# Altium PCB featherFet2.PcbDoc
Units mm, origin at the board's own origin, x right, y up, seen from the top; angles counter-clockwise.
Board outline 50.04 x 22.86 mm, 2 copper layers (Top Layer, Bottom Layer); 21 components, 23 nets, 85 pads, 16 vias.
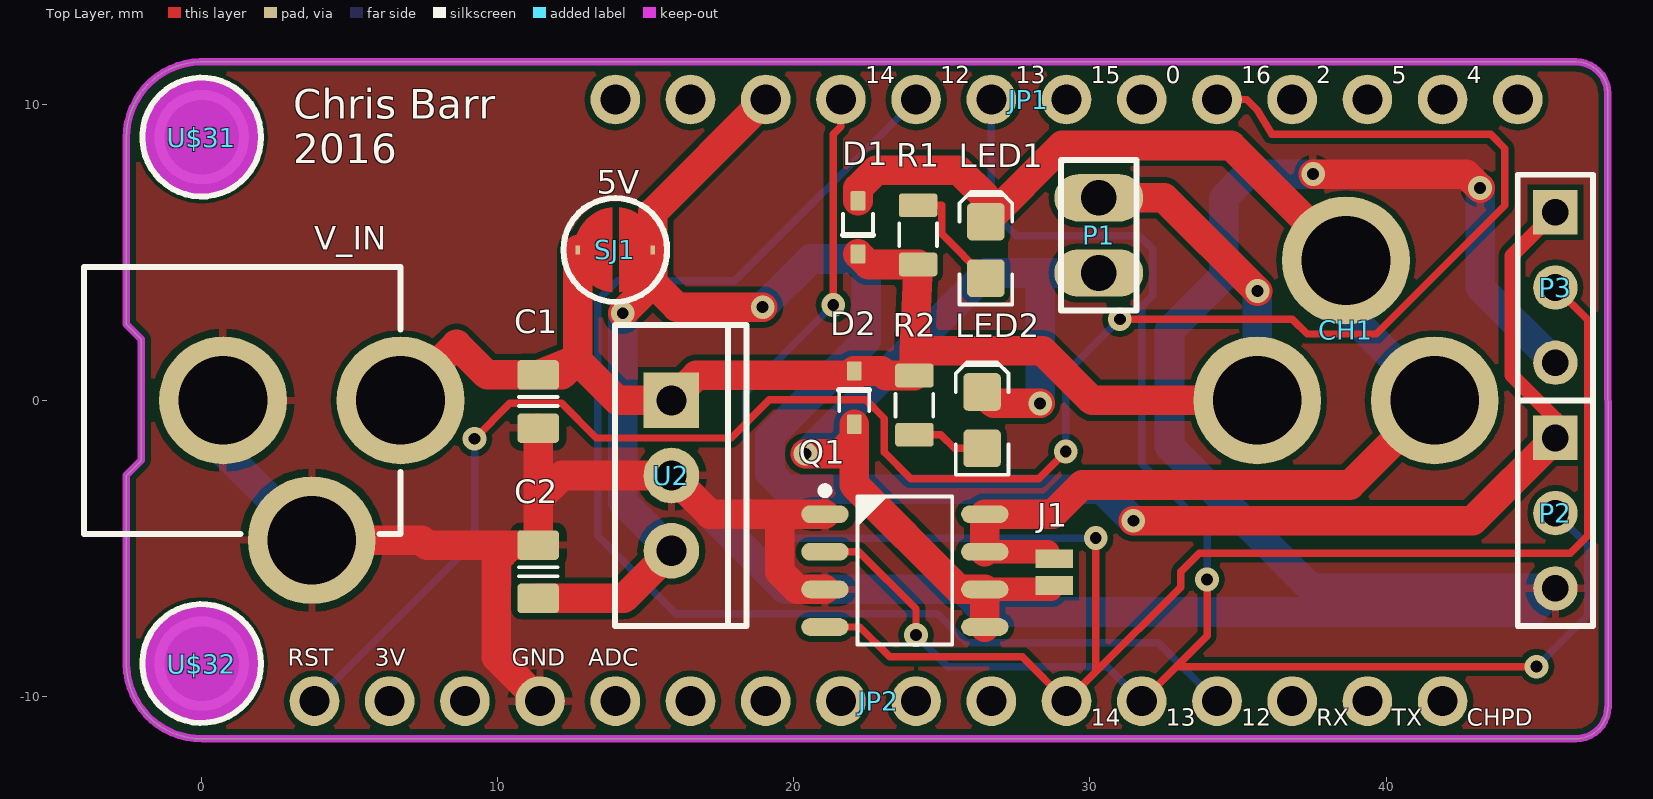
[diagram p0: Top Layer view]
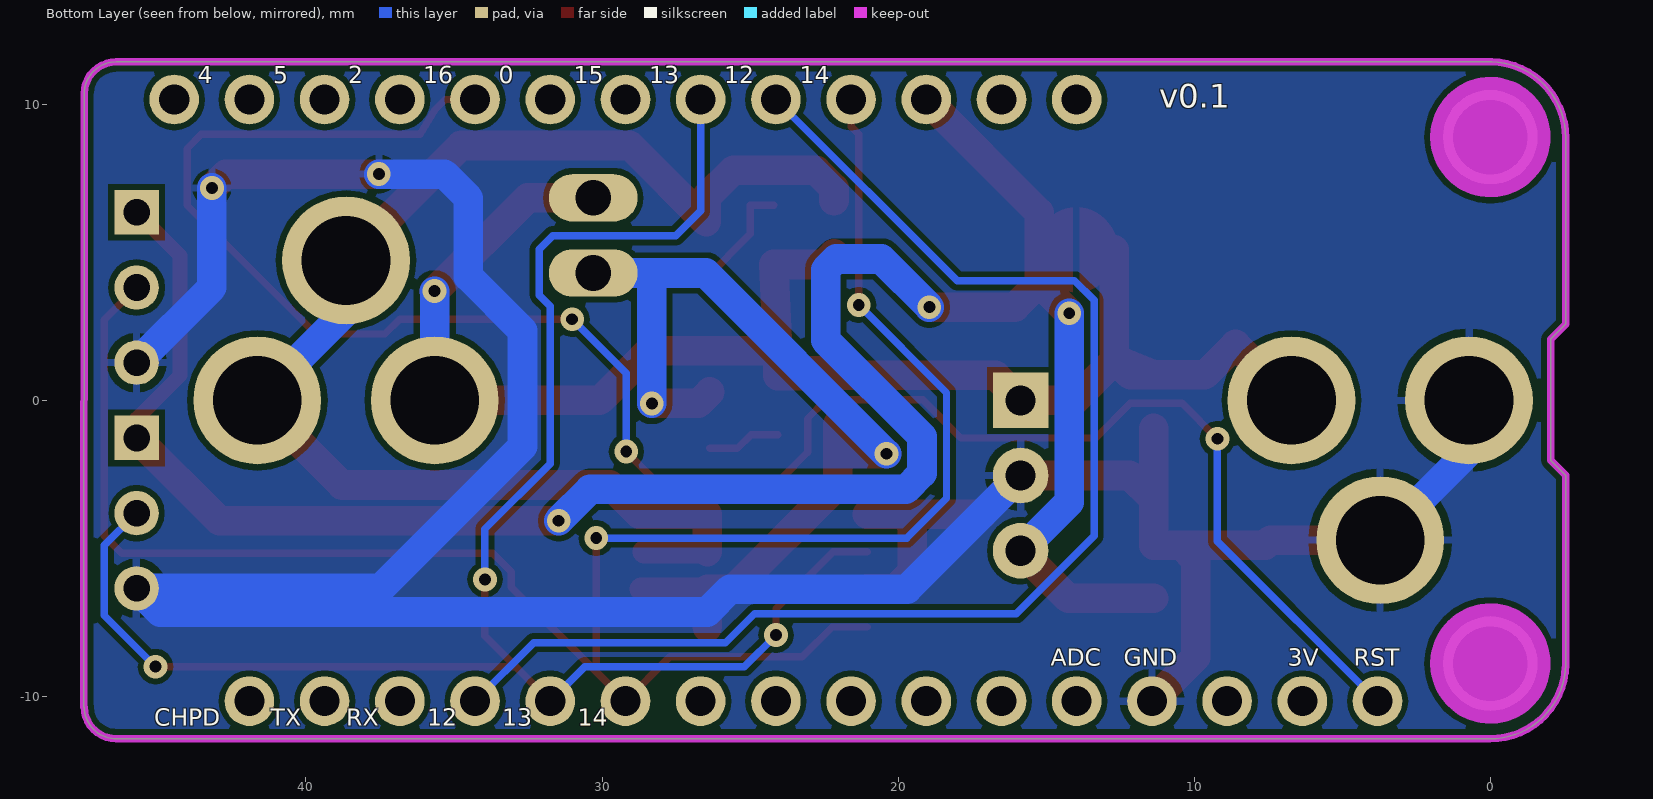
[diagram p1: Bottom Layer view, seen from below]

## Layer stack, top to bottom
Top Solder: solder mask 0.0102, Solder Resist, Dk 3.5
Top Layer: signal copper 0.0356
Dielectric1: dielectric 0.32, FR-4, Dk 4.8
Bottom Layer: signal copper 0.0356
Bottom Solder: solder mask 0.0102, Solder Resist, Dk 3.5

## Board outline
-2.54,-8.929 -2.54,-2.53 -2.04,-2.03 -2.04,2.07 -2.54,2.57 -2.54,8.87 cw(c0,8.89) -0.039,11.43 46.4,11.43 cw(c46.409,10.344) 47.494,10.361 47.5,-10.361 47.494,-10.361 cw(c46.409,-10.344) 46.4,-11.43 0.02,-11.43 cw(c0,-8.89)

## Design rules (kind name [scope] priority, off if disabled: settings)
Clearance [All] p1: gap=0.2
FabricationTestPointUsage TestPointUsage [All] p1: valid=0 allowmultiple=FALSE
FabricationTestpoint Testpoint [All] p1: side=3 testpointundercomponent=TRUE minsize=1.016 maxsize=2.54 preferedsize=1.524 minholesize=0 maxholesize=1.016 preferedholesize=0.813 testpointgrid=0.025 allowsidetop=TRUE allowsidebottom=TRUE usegrid=TRUE gridtolerance=0
HoleSize [All] p1: absolutevalues=TRUE maxlimit=3.5 minlimit=0.025 maxpercent=80.000 minpercent=20.000
PolygonConnect [All] p1: connectstyle=Relief reliefconductorwidth=0.254 reliefentries=4 polygonreliefangle="90 Angle" airgapwidth=0.254
RoutingVias [All] p1: holewidth=0.4 width=0.8 viastyle="Through Hole" minholewidth=0.25 minwidth=0.5 maxholewidth=1 maxwidth=1.4
SilkToSolderMaskClearance SilkscreenOverComponentPads [IsPad] p1: minsilkscreentomaskgap=0.254 clearancetoexposedcopper=TRUE
SolderMaskExpansion [All] p1: expansion=0.102
Width Width_Power [(InNet('+3V3') OR InNet('C1_NEG') OR InNet('C2_NEG') OR InNet('GND') OR InNet('VBUS') OR InNet('V_PWR'))] p1: maxlimit=1 minlimit=0.2 preferedwidth=1 minimp=50.000000 maximp=50.000000 favimp=50.000000
Width [All] p2: maxlimit=1 minlimit=0.2 preferedwidth=0.25
26 further rules are at their usual default settings.

## Components (designator, comment, footprint, x,y, rotation, side; value= is the part's Value field where it differs from the comment)
C1 "approved sub OK" CAPC2012X135N 11.365,-0.04 r270 top
C2 "approved sub OK" CAPC2012X135N 11.365,-5.79 r90 top
CH1 "Power JackThis is the standard 5.5mm barrel jack for power. The PTH is the most common, proven, reliable, footprint. The Slot footprint only works if the mill layer is transmitted to the PCB fab house so be warned. Mating wall wart : TOL-00298 (and others)" POWER_JACK_PTH 49.365,0 r90 top
D1 "1N4148" SOD523F 22.166,5.842 r90 top
D2 "1N4148" SOD523F 22.04,0.092 r270 top
J1 "JUMPER-PAD-2-NO" PAD-JUMPER-2-NO_NO_SILK 28.8,-5.8 r270 top
JP1 "HEADER-1X12" 1X12_ROUND 27.94,10.16 r0 top locked
JP2 "HEADER-1X16ROUND" 1X16_ROUND 22.86,-10.16 r180 top locked
LED1 "Red" LED-0805-K 26.484,5.08 r90 top
LED2 "Red" LED-0805-K 26.358,-0.67 r90 top
P1 "Header 2" HDR1X2 30.3,4.3 r90 top
P2 "Header 3" HDR1X3 45.72,-1.27 r270 top
P3 "Header 3" HDR1X3 45.72,6.35 r270 top
Q1 "MOSFET_AO4818B" SOIC127P600X175-8AN 23.75,-5.75 r0 top
R1 "Thick Film" RESC2012X70N 24.198,5.588 r90 top
R2 "Thick Film" RESC2012X70N 24.072,-0.162 r270 top
SJ1 "JUMPER-PAD-2-NOROUND" PAD-JUMPER-2-NO_YES_SILK_ROUND 13.97,5.08 r0 top
U2 "LM7805" TO220-IGO 15.865,-2.54 r270 top
U$31 "MOUNTINGHOLE2.5" MOUNTINGHOLE_2.5_PLATED 0,8.89 r270 top locked
U$32 "MOUNTINGHOLE2.5" MOUNTINGHOLE_2.5_PLATED 0,-8.89 r270 top locked
V_IN "Power JackThis is the standard 5.5mm barrel jack for power. The PTH is the most common, proven, reliable, footprint. The Slot footprint only works if the mill layer is transmitted to the PCB fab house so be warned. Mating wall wart : TOL-00298 (and others)" POWER_JACK_PTH -7,0 r270 top

## Footprints (in the part's own frame and the unit in brackets; to place one, negate y for a bottom-side part, rotate by r counter-clockwise, add the part's x,y. Pads: shape width x height; smd on the part's side, far side on the other; paste and mask are expansions set on the pad)
1X12_ROUND [mil] "1X12_ROUND"
  round 66 hole 40: 1(-550,0) 2(-450,0) 3(-350,0) 4(-250,0) 5(-150,0) 6(-50,0) 7(50,0) 8(150,0) 9(250,0) 10(350,0) 11(450,0) 12(550,0)
1X16_ROUND [mil] "1X16_ROUND"
  round 66 hole 40: 1(-750,0) 2(-650,0) 3(-550,0) 4(-450,0) 5(-350,0) 6(-250,0) 7(-150,0) 8(-50,0) 9(50,0) 10(150,0) 11(250,0) 12(350,0) 13(450,0) 14(550,0) 15(650,0) 16(750,0)
CAPC2012X135N [mm] "Chip Capacitor, Body 2.0x1.2mm, EIA 0805, IPC Medium Density"
  round 0.254 on Mech15: 0(0,0)
  rrect25% 1x1.4 smd: 1(-0.9,0) 2(0.9,0)
  Top Layer pour cut-out: -0.675,0.7 -0.475,0.9 0.475,0.9 0.675,0.7 0.675,-0.7 0.475,-0.9 -0.475,-0.9 -0.675,-0.7
  silkscreen extent -0.15,-0.65 0.15,0.65, body extent -1.1,-0.72 1.1,0.73, height 1.34
HDR1X2 [mm] "Connector; Header; 2 Position"
  oval 1.6x3 hole 1.2: 1(0,0) 2(2.54,0)
  silkscreen extent -1.27,-1.27 3.81,1.27
HDR1X3 [mm] "Connector; Header; 3 Position"
  rect 1.5x1.5 hole 0.9: 1(0,0)
  round 1.5 hole 0.9: 2(2.54,0) 3(5.08,0)
  silkscreen extent -1.27,-1.27 6.35,1.27
LED-0805-K [mil]
  round 20 on Mech15: 0(0,0)
  rrect25% 50x50 smd: A(-37.5,0) K(37.5,0)
  Top Layer pour cut-out: -15,30 15,30 15,-30 -15,-30
  silkscreen extent -72,-35 77,35, body extent -39,-25 39,25, height 31
MOUNTINGHOLE_2.5_PLATED [mil] "MOUNTINGHOLE_2.5_PLATED"
  round 126 hole 99: P$1(0,0)
  Top Layer keep-out circle w80: c0,0 r40
  Bottom Layer keep-out circle w80: c0,0 r40
  silkscreen extent -79,-79 79,79
PAD-JUMPER-2-NO_NO_SILK [mm]
  rect 0.635x1.27 smd: 1(-0.45,0) 2(0.457,0)
PAD-JUMPER-2-NO_YES_SILK_ROUND [mil]
  rrect20% 6x12 smd: 1(-50,0) 2(50,0)
  Top Layer region: -4.38,57 -4.38,-56.25 -29.99,-46.91 -48.1,-26.53 -54.37,0 -54.38,0 -48.23,26.77 -30.12,47.42 -4.37,57
  Top Layer region: 5,-56.25 30.62,-46.91 48.73,-26.53 55,0 55,0 48.86,26.77 30.74,47.42 5,57 5,57
  silkscreen extent -69,-69 69,69
POWER_JACK_PTH [mil]
  round 170 hole 118: GND(0,304) GNDBREAK(186,422) PWR(0,540)
RESC2012X70N [mm] "Chip Resistor, Body 2.0x1.2mm, EIA 0805, IPC Medium Density"
  round 0.254 on Mech15: 0(0,0)
  rrect25% 0.8x1.3 smd: 1(-1,0) 2(1,0)
  Top Layer pour cut-out: -0.725,0.65 -0.525,0.85 0.525,0.85 0.725,0.65 0.725,-0.65 0.525,-0.85 -0.525,-0.85 -0.725,-0.65
  silkscreen extent -0.38,-0.64 0.38,0.63, body extent -1.1,-0.67 1.1,0.68, height 0.69
SOD523F [mm] "SOD-523F; 2 Leads; Body 1.3 x 0.9 mm, (LxW)"
  round 0.508 on Mech15: 0(0,0)
  rrect20% 0.65x0.5 smd: A(0.9,0) K(-0.9,0)
  Top Layer pour cut-out: -0.725,-0.25 -0.725,0.25 -0.525,0.45 0.525,0.45 0.725,0.25 0.725,-0.25 0.525,-0.45 -0.525,-0.45
  silkscreen extent -0.25,-0.51 0.45,0.51, body extent -0.85,-0.45 0.85,0.45, height 0.7
SOIC127P600X175-8AN [mm] "SOIC, 8-Leads, Body 4.9x3.9mm, Pitch 1.27mm, IPC Medium Density"
  round 1 on Mech15: 0(0,0)
  oval 1.6x0.6 smd: 1(-2.7,1.905) 2(-2.7,0.635) 3(-2.7,-0.635) 4(-2.7,-1.905) 5(2.7,-1.905) 6(2.7,-0.635) 7(2.7,0.635) 8(2.7,1.905)
  silkscreen extent -2.82,-2.5 1.6,2.82, body extent -3,-2.45 3,2.45, height 1.75
TO220-IGO [mil]
  round 74 hole 40: GND(0,0) OUT(100,0)
  rect 74x74 hole 40: IN(-100,0)
  silkscreen extent -200,-75 200,100

## Part data
C1: library part CAPC_330n_0805_X7R_25V_10%, "Capacitor SMD Cer 330nF 10% 25V X7R 0805"
C2: library part CAPC_100n_0805_X7R_50V_10%, "Capacitor SMD Cer 100nF 10% 50V X7R 0805"
CH1 V_IN: library part POWER_JACKPTH
D1 D2: library part DIODE_1N4148_200mA_SOD523F, "Diode SMD small signal 0.2A SOD-523F"
JP2: "PIN HEADER"
LED1 LED2: library part LED_SMD_Red_0805_6mcd, "LED 0805 SMD Red 6mcd 621nm"
P1: "Header, 2-Pin"
P2 P3: "Header, 3-Pin"
Q1: "MOSFET Dual-Channel 30V 8.5A SOIC-8 SMD"
R1 R2: library part RES_2K2_0805_1%, "Resistor SMD chip 2.2k Ohm 0.125W 1% 0805"
U2: library part V_REG_78XXSINK
U$31 U$32: "Mounting Hole   For #2 screws (0.086\"/2.18mm width, 0.094\"/2.4mm hole) use 2.5mm"

## Free pads (board coordinates)
  round 1.676 hole 1.016: 0(44.45,10.16)

## Via types
v1: diameter 0.8, hole 0.4, Top Layer to Bottom Layer, 16 vias

## Nets (pads, with @x,y where several pads share a name; then routed paths per layer and width w, separated by ;. In a path a pad name is that pad's centre, name@x,y a point inside that pad or via, vN(x,y) a via of type N, cw(c..) or ccw(c..) an arc to the next point about the centre after c; other vN are vias at no path point)
+3V3: JP2.15
ADC: JP2.12
C1_NEG: CH1.GND CH1.GNDBREAK D1.A J1.1 LED1.K Q1.7 Q1.8 | length 47.2
  Top Layer w0.8: Q1.7 J1.1@28.575,-5.115
  Top Layer w1: D1.A 22.166,7.16 22.776,7.769 25.575,7.769 26.484,6.86 LED1.K 29.059,8.607 34.763,8.607 CH1.GNDBREAK ; Q1.7 Q1.8 28.75,-3.845 29.736,-2.859 38.784,-2.859 CH1.GND
  Bottom Layer w1: CH1.GNDBREAK 38.646,2.997 CH1.GND
C1_PWM: JP1.6 JP2.5 P2.2 Q1.2 | length 58.8
  Top Layer w0.25: Q1.2 22.196,-5.115 24.127,-7.045 v1(24.127,-7.928) ; JP2.5 32.915,-8.995 ; v1(33.957,-6.048) 33.957,-7.953 32.915,-8.995 ; v1(45.082,-8.995) 32.915,-8.995
  Bottom Layer w0.25: v1(24.127,-7.928) 25.194,-8.995 30.585,-8.995 JP2.5 ; JP1.6 26.67,6.398 27.508,5.559 31.671,5.559 32.125,5.105 32.125,3.55 31.747,3.172 31.747,-2.137 33.957,-4.347 v1(33.957,-6.048) ; v1(45.082,-8.995) 46.809,-7.268 46.809,-4.899 P2.2
C2_NEG: D2.A J1.2 LED2.K P1.1 Q1.5 Q1.6 | length 32.3
  Top Layer w0.8: Q1.6 J1.2@28.672,-6.385
  Top Layer w1: v1(20.393,-1.807) 21.557,-1.807 22.04,-1.324 ; D2.A 22.04,-1.324 ; LED2.K 26.745,-0.105 v1(28.318,-0.105) ; Q1.5 Q1.6 25.575,-6.385 22.04,-2.85 22.04,-1.324
  Bottom Layer w1: v1(20.393,-1.807) 26.5,4.3 28.623,4.3 ; v1(28.318,-0.105) 28.318,3.995 28.623,4.3 ; P1.1 28.623,4.3
C2_PWM: JP1.4 JP2.6 P3.2 Q1.4 | length 70
  Top Layer w0.25: Q1.4 22.225,-7.655 23.234,-8.665 27.715,-8.665 JP2.6 30.197,-9.173 ; v1(21.333,3.223) 21.333,8.985 21.59,9.242 JP1.4 ; v1(30.197,-4.651) 30.197,-9.173 ; P3.2 46.809,2.721 46.809,-4.575 46.223,-5.161 33.694,-5.161 33.061,-5.794 33.061,-6.309 30.197,-9.173
  Bottom Layer w0.25: v1(21.333,3.223) 18.368,0.258 18.368,-3.312 19.707,-4.651 v1(30.197,-4.651)
CH_PD: JP2.1
EN: JP1.2
GND: C1.2 C2.2 JP2.13 P2.3 P3.3 Q1.1 Q1.3 U2.GND V_IN.GND V_IN.GNDBREAK | length 110.5
  Top Layer w1: V_IN.GNDBREAK 7.439,-4.724 7.605,-4.89 10.452,-4.89 ; C1.2 11.365,-3.356 ; JP2.13 9.954,-8.684 9.954,-5.388 10.452,-4.89 ; Q1.3 20.12,-6.385 19.529,-5.794 19.529,-4.169 19.853,-3.845 ; Q1.1 19.853,-3.845 ; v1(37.538,7.642) 42.707,7.642 v1(43.177,7.173) ; 10.452,-4.89 C2.2 11.365,-3.356 ; 11.365,-3.356 12.181,-2.54 U2.GND 17.17,-3.845 19.853,-3.845
  Bottom Layer w1: V_IN.GND 0.722,-1.727 V_IN.GNDBREAK ; U2.GND 19.703,-6.378 25.677,-6.378 26.447,-7.149 44.921,-7.149 P2.3 37.484,-6.35 32.688,-1.554 32.688,2.35 34.515,4.177 34.515,6.829 35.328,7.642 v1(37.538,7.642) ; v1(43.177,7.173) 43.177,3.813 P3.3
GPIO0: JP1.8
GPIO2: JP1.10
GPIO4/SDA: JP1.12
GPIO5/SCL: JP1.11
GPIO12/MISO: JP1.5 JP2.4 | length 44.7
  Bottom Layer w0.25: JP1.5 18.005,4.035 14.043,4.035 13.383,3.375 13.383,-4.575 16.01,-7.203 24.852,-7.203 25.831,-8.182 32.312,-8.182 JP2.4
GPIO15: JP1.7
GPIO16: JP1.9 JP2.16 | length 67.4
  Top Layer w0.25: v1(9.217,-1.299) 10.411,-0.105 12.163,-0.105 13.332,-1.273 17.884,-1.273 19.174,0.017 22.43,0.017 23.06,-0.613 23.06,-1.756 23.949,-2.645 28.267,-2.645 v1(29.181,-1.73) ; v1(31.01,2.74) 36.835,2.74 37.335,2.24 39.675,2.24 44.015,6.58 44.015,8.506 43.532,8.988 36.141,8.988 35.658,9.801 35.3,10.16 JP1.9
  Bottom Layer w0.25: JP2.16 9.217,-4.753 v1(9.217,-1.299) ; v1(29.181,-1.73) 29.181,0.911 v1(31.01,2.74)
NetLED1_A: LED1.A R1.2 | length 3.9
  Top Layer w0.25: R1.2 24.99,6.588 24.99,5.621 LED1.A
NetLED2_A: LED2.A R2.2 | length 2.5
  Top Layer w0.25: R2.2 24.965,-1.162 25.426,-1.623 LED2.A
RXD: JP2.3
TXD: JP2.2
V_PWR: C1.1 CH1.PWR D1.K D2.K P1.2 R1.1 R2.1 SJ1.1 U2.IN V_IN.PWR | length 53.6
  Top Layer w1: V_IN.PWR 8.607,1.891 9.639,0.86 C1.1 ; SJ1.1 12.7,1.397 ; D1.K 22.52,4.588 R1.1 24.072,1.673 ; P1.2 32.509,6.84 v1(35.658,3.69) ; CH1.PWR 30.074,0 28.4,1.673 24.072,1.673 ; C1.1 12.7,1.397 ; C1.1 12.163,0.86 12.671,1.368 ; 12.671,1.368 12.7,1.397 ; 12.671,1.368 14.039,0 U2.IN 16.707,0.842 22.04,0.842 D2.K 22.958,0.992 23.112,0.838 R2.1 24.072,1.673
  Bottom Layer w1: CH1.PWR 35.649,3.681 v1(35.658,3.69)
VBAT: JP1.1
VBUS: C2.1 JP1.3 P2.1 P3.1 SJ1.2 U2.OUT | length 76.9
  Top Layer w0.5: P2.1 45.72,-0.62 44.252,0.848 44.252,4.882 P3.1
  Top Layer w1: C2.1 14.255,-6.69 U2.OUT ; v1(14.221,2.943) 15.24,3.959 ; v1(18.945,3.146) 16.053,3.146 15.24,3.959 ; JP1.3 15.24,6.35 SJ1.2 15.24,3.959 ; v1(31.467,-4.067) 42.923,-4.067 P2.1
  Bottom Layer w1: v1(14.221,2.943) 14.221,-3.436 U2.OUT ; v1(18.945,3.146) 20.571,4.772 22.095,4.772 22.45,4.416 22.45,2.029 19.193,-1.229 19.193,-2.461 19.739,-3.007 30.407,-3.007 v1(31.467,-4.067)
pads on no net: C1.0 C2.0 D1.0 D2.0 JP2.7 JP2.8 JP2.9 JP2.10 JP2.11 JP2.14 LED1.0 LED2.0 Q1.0 R1.0 R2.0 U$31.P$1 U$32.P$1

## Polygon pours and split planes (outlines as drawn)
GND on Bottom Layer "Bottom Layer-GND" (solid, pour order 8): -2.54,8.87 -0.039,11.371 -0.039,11.43 46.4,11.43 47.469,10.361 47.494,10.361 47.494,-10.355 47.5,-10.361 46.432,-11.43 46.4,-11.43 0.02,-11.43 -2.481,-8.929 -2.54,-8.929
GND on Top Layer "V_PWR_L02_P010" (solid, pour order 10): -2.54,8.87 -0.039,11.371 -0.039,11.43 46.4,11.43 47.469,10.361 47.494,10.361 47.494,-10.355 47.5,-10.361 46.432,-11.43 46.4,-11.43 0.02,-11.43 -2.481,-8.929 -2.54,-8.929

## Keep-outs
Keep-Out Layer:
  lines w0.254: -0.039,11.43 ccw(c0,8.89) -2.54,8.87 -2.54,2.57 -2.04,2.07 -2.04,-2.03 -2.54,-2.53 -2.54,-8.929 ccw(c0,-8.89) 0.02,-11.43 46.4,-11.43 ccw(c46.409,-10.344) 47.494,-10.361 ; -0.039,11.43 46.4,11.43 cw(c46.409,10.344) 47.494,10.361 47.5,-10.361

## Silkscreen, mask and mechanical layers (free items; w line width, h text height)
Top Overlay:
  text "14" at 22.407,10.515 h1
  text "12" at 24.947,10.515 h1
  text "13" at 27.487,10.515 h1
  text "15" at 30.027,10.515 h1
  text "0" at 32.567,10.515 h1
  text "16" at 35.107,10.515 h1
  text "2" at 37.647,10.515 h1
  text "5" at 40.187,10.515 h1
  text "4" at 42.727,10.515 h1
  text "Chris Barr / 2016" at 3.1,8.01 h1
  text "5V" at 13.335,6.985 h0.8
  text "RST" at 2.91,-9.16 h1
  text "3V" at 5.84,-9.16 h1
  text "GND" at 10.48,-9.16 h1
  text "ADC" at 13.05,-9.16 h1
  text "14" at 30.027,-11.195 h1
  text "13" at 32.567,-11.195 h1
  text "12" at 35.107,-11.195 h1
  text "RX" at 37.647,-11.195 h1
  text "TX" at 40.187,-11.195 h1
  text "CHPD" at 42.727,-11.195 h1
Bottom Overlay:
  text "14" at 23.331,10.515 h1
  text "12" at 25.871,10.515 h1
  text "13" at 28.411,10.515 h1
  text "15" at 30.951,10.515 h1
  text "0" at 33.491,10.515 h1
  text "16" at 36.031,10.515 h1
  text "2" at 38.571,10.515 h1
  text "5" at 41.111,10.515 h1
  text "4" at 43.651,10.515 h1
  text "v0.1" at 11.175,9.875 h0.8
  text "RST" at 4.61,-9.16 h1
  text "3V" at 6.84,-9.16 h1
  text "GND" at 12.38,-9.16 h1
  text "ADC" at 14.85,-9.16 h1
  text "14" at 30.827,-11.195 h1
  text "13" at 33.367,-11.195 h1
  text "12" at 35.907,-11.195 h1
  text "RX" at 38.647,-11.195 h1
  text "TX" at 41.187,-11.195 h1
  text "CHPD" at 45.127,-11.195 h1
Mechanical 4:
  lines w0.254: 7.25,-8.93 43.5,-8.93 43.5,9.07 7.25,9.07 7.25,-8.93
Mechanical 14:
  lines w0.254: -2.032,0 46.95,0
Mechanical 16:
  drawing of 1878 lines, arcs and shapes, not listed
  text "1" at -97.285,73.479 h1.78
  text "2" at -24.641,73.479 h1.78
  text "3" at 48.511,73.479 h1.78
  text "4" at 121.409,73.479 h1.78
  text "A" at -131.626,50.467 h1.78
  text "A" at 155.394,50.467 h1.78
  text "B" at -131.626,2.41 h1.78
  text "B" at 155.394,2.41 h1.78
  text "C" at -131.626,-46.104 h1.78
  text "C" at 155.394,-46.104 h1.78
  text "ENGINEER:" at 40.459,-83.112 h1.14
  text "TITLE:" at 78.559,-83.112 h1.14
  text "PCB DESIGNER:" at 40.459,-90.605 h1.14
  text "D" at -131.626,-94.11 h1.78
  text "D" at 155.394,-94.11 h1.78
  text "DATE:" at 40.459,-98.352 h1.14
  text "PART NO.:" at 78.559,-98.352 h1.14
  text "REV:" at 131.899,-98.352 h1.14
  text "Altium Limited" at 7.439,-100.892 h1.78
  text ".PRINT_DATE" at 41.729,-101.4 h1.78
  text "12a Rodborough Rd" at 7.439,-103.432 h1.78
  text "Frenchs Forest" at 7.439,-105.972 h1.78
  text "FILE NAME:" at 40.459,-105.972 h1.14
  text "DWG NO:" at 78.559,-105.972 h1.14
  text "SCALE:" at 131.899,-105.972 h1.14
  text "NSW 2086" at 7.439,-108.512 h1.78
  text ".PCB_FILE_NAME_NO_PATH" at 41.729,-109.02 h1.78
  text "1" at -97.285,-114.481 h1.78
  text "2" at -24.641,-114.481 h1.78
  text "3" at 48.511,-114.481 h1.78
  text "4" at 121.409,-114.481 h1.78

## Dimensions
-2.54,8.87 to 47.494,10.361 on Mechanical 12
0,8.89 to 0,-8.89 on Mechanical 12
1.905,11.43 to 2.235,-11.43 on Mechanical 12
7.25,9.07 to 7.25,-8.93 on Mechanical 4
7.25,9.07 to 43.5,9.07 on Mechanical 4